# EAGLE board Bullseye_Calibrator_Through_Hole (EAGLE 7.7.0)
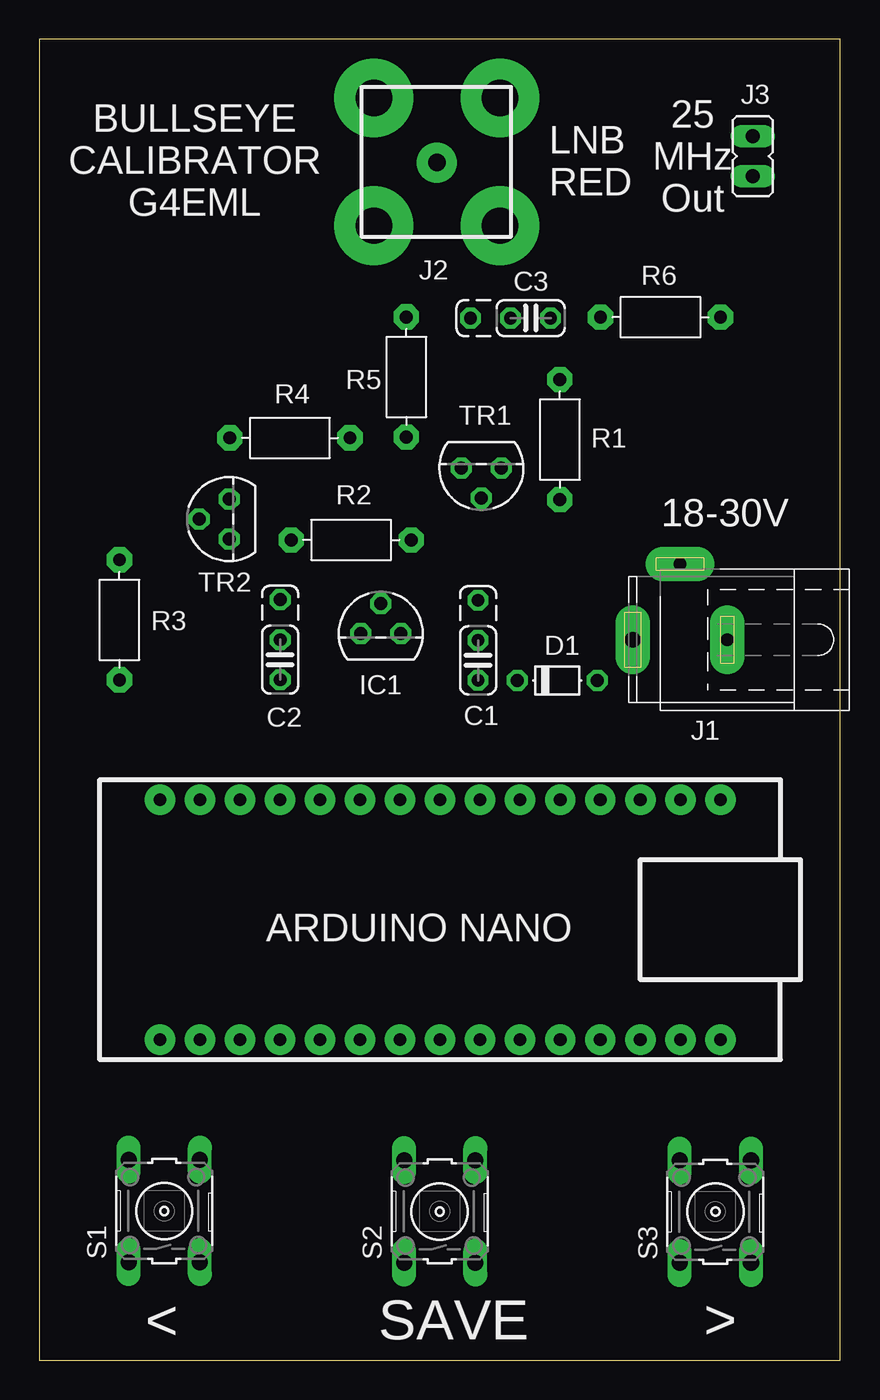
[diagram p0: board, top side]
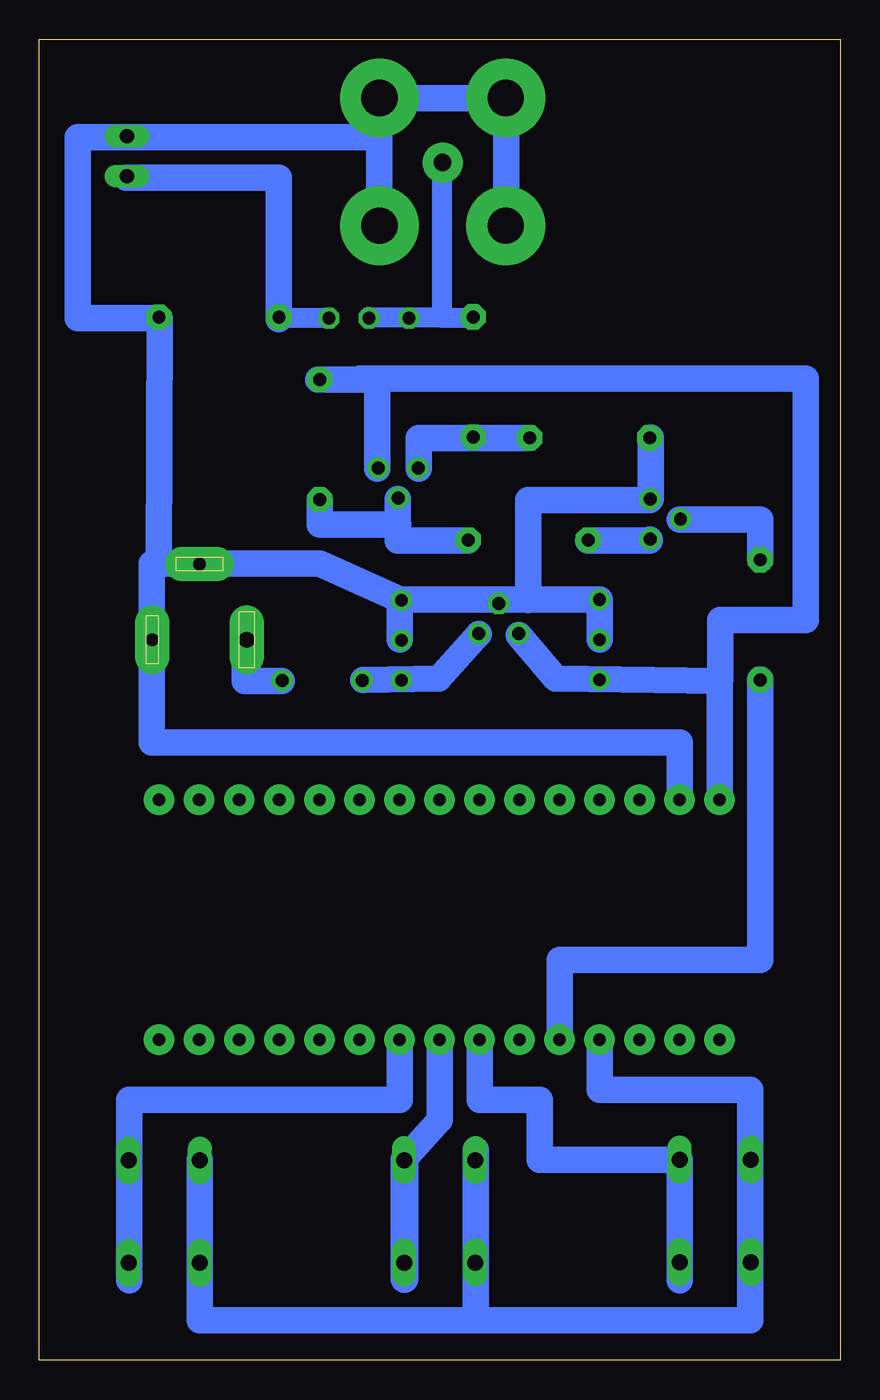
[diagram p1: board, bottom side, seen from below]

Size 50.8 x 83.82 mm. Coordinates in mm from the lower left corner, seen from the top.
Outline: 0,83.82 0,0 50.8,0 50.8,83.82 0,83.82
Copper layers (1*16): Top 0.035mm / dielectric 1.5mm / Bottom 0.035mm
Design rules "default": minimum track width 10mil, minimum drill 24mil, track to track 8mil, track to pad 8mil, pad to pad 8mil, via to via 8mil, smd to smd 8mil, copper to edge 40mil, drill to drill 8mil, minimum pad ring 10mil, minimum via ring 8mil, stop-mask expansion 4mil, vias tented up to drill 0mil, thermal gap 10mil

## Footprints (pad centres in the part's own frame; a part is rotated, then mirrored left to right if it is on the bottom)
C025_050-024X070 = drill 0.813 octagon: 1 -3.81,0; 2 -1.27,0; 3 1.27,0
D-5 = drill 0.813 octagon: A 2.54,0; C -2.54,0
TO92 = drill 0.813 octagon: 1 -1.27,0; 2 0,1.905; 3 1.27,0
SPC4077 = drill 0.8 pad 2.184 long: 1 -3,0; 2 0,-4.8 | drill 1 pad 2.184 long: 3 3,0
JP1 = drill 0.914 long: 1 0,-1.27; 2 0,1.27
R-7,5 = drill 0.813 pad 1.6 octagon: 1 -3.81,0; 2 3.81,0
B3F-10XX = drill 1.016 long: 1 -3.251,2.261; 2 3.251,2.261; 3 -3.251,-2.261; 4 3.251,-2.261

## Placement (x,y rotation side)
C1  100n  [C025_050-024X070]  27.83,44.41 270 top
C2  100n  [C025_050-024X070]  15.27,44.45 270 top
C3  470p  [C025_050-024X070]  31.16,66.13 0 top
D1  [D-5]  32.86,43.14 0 top
IC1  78L15  [TO92]  21.66,46.1 0 top
J1  [SPC4077]  40.64,45.72 180 top
J3  [JP1]  45.26,76.41 0 top
R1  10K  [R-7,5]  33.02,58.42 270 top
R2  1K  [R-7,5]  19.78,52.05 180 top
R3  10K  [R-7,5]  5.08,46.98 90 top
R4  3K3  [R-7,5]  15.89,58.53 180 top
R5  1K  [R-7,5]  23.28,62.39 90 top
R6  75  [R-7,5]  39.4,66.19 180 top
S1  [B3F-10XX]  7.92,9.46 90 top
S2  [B3F-10XX]  25.4,9.43 90 top
S3  [B3F-10XX]  42.89,9.42 90 top
TR1  P-Chan  [TO92]  28.04,56.62 180 top
TR2  NPN  [TO92]  12.04,53.38 90 top

## Library data of the parts
C1-C3 = rcl
D1 = ref-packages
IC1 TR1 TR2 = linear
J1 = con-jack
J3 = jumper
R1-R6 = discrete
S1-S3 = switch-omron

## Tracks (layer width: path | path; a pad name or v marks a point on that pad's centre or on a via)
D1
  Bottom 1.676: 22.93,46.08 25.45,43.26 30.26,43.17
S$1  (via drill 1.1 pad 2.54)
  other vias: 25.22,76
S$2  (via drill 0.8 pad 1.93)
  other vias: 43.2,35.57
S$3  (via drill 0.8 pad 1.93)
  other vias: 40.66,35.57
S$4  (via drill 0.8 pad 1.93)
  other vias: 38.12,35.57
S$5  (via drill 0.8 pad 1.93)
  other vias: 35.58,35.57
S$6  (via drill 0.8 pad 1.93)
  other vias: 33.04,35.57
S$7  (via drill 0.8 pad 1.93)
  other vias: 30.5,35.57
S$8  (via drill 0.8 pad 1.93)
  other vias: 27.96,35.57
S$9  (via drill 0.8 pad 1.93)
  other vias: 25.42,35.57
S$10  (via drill 0.8 pad 1.93)
  other vias: 22.88,35.57
S$11  (via drill 0.8 pad 1.93)
  other vias: 20.34,35.57
S$12  (via drill 0.8 pad 1.93)
  other vias: 17.8,35.57
S$13  (via drill 0.8 pad 1.93)
  other vias: 15.26,35.57
S$14  (via drill 0.8 pad 1.93)
  other vias: 12.72,35.57
S$15  (via drill 0.8 pad 1.93)
  other vias: 10.18,35.57
S$16  (via drill 0.8 pad 1.93)
  other vias: 7.64,35.57
S$17  (via drill 0.8 pad 1.93)
  other vias: 7.64,20.33
S$18  (via drill 0.8 pad 1.93)
  other vias: 10.18,20.33
S$19  (via drill 0.8 pad 1.93)
  other vias: 12.72,20.33
S$20  (via drill 0.8 pad 1.93)
  other vias: 15.26,20.33
S$21  (via drill 0.8 pad 1.93)
  other vias: 17.8,20.33
S$22  (via drill 0.8 pad 1.93)
  other vias: 20.34,20.33
S$23  (via drill 0.8 pad 1.93)
  other vias: 22.88,20.33
S$24  (via drill 0.8 pad 1.93)
  other vias: 25.42,20.33
S$25  (via drill 0.8 pad 1.93)
  other vias: 27.96,20.33
S$26  (via drill 0.8 pad 1.93)
  other vias: 30.5,20.33
S$27  (via drill 0.8 pad 1.93)
  other vias: 33.04,20.33
S$28  (via drill 0.8 pad 1.93)
  other vias: 35.58,20.33
S$29  (via drill 0.8 pad 1.93)
  other vias: 38.12,20.33
S$30  (via drill 0.8 pad 1.93)
  other vias: 40.66,20.33
S$31  (via drill 0.8 pad 1.93)
  other vias: 43.2,20.33
S$32
  Bottom 1.676: 5.71,12.7 5.71,2.54 23.11,2.54 | 23.11,2.54 23.11,13.34 | 23.11,2.54 40.64,2.54 40.64,12.7
S$33
  Bottom 1.676: 15.24,20.32 15.24,17.14 5.7,17.14 5.7,11.97
S$34
  Bottom 1.676: 17.78,20.32 17.78,25.4 5.08,25.4 5.08,43.18
S$35  (via drill 2.3 pad 5)
  other vias: 29.22,72
S$36  (via drill 2.3 pad 5)
  other vias: 29.22,80.1
S$37  (via drill 2.3 pad 5)
  other vias: 21.22,72
S$38  (via drill 2.3 pad 5)
  other vias: 21.22,80.1
S$39
  Bottom 1.676: 22.86,20.32 22.86,16.51 19.05,16.51 19.05,12.7 10.16,12.7 10.16,5.08
S$40
  Bottom 1.676: 25.4,20.32 25.4,15.24 27.65,12.75
  Bottom 1.778: 27.65,12.75 27.65,5.13
S$41
  Bottom 1.676: 27.94,20.32 27.94,16.51 45.09,16.51 45.09,5.08
S$42
  Bottom 1.676: 20.39,46.01 18.03,43.25 7.63,43.09 7.63,35.56
  Bottom 1.778: 7.63,35.56 7.62,35.56
S$43
  Bottom 1.676: 35.42,43.1 37.76,43.1 37.76,45.46
S$44
  Bottom 1.676: 27.94,45.72 27.94,48.26 | 27.94,48.26 15.24,48.26 15.24,45.72 | 27.94,48.26 33.02,50.54 43.66,50.54 43.66,44.58
  Bottom 1.778: 43.66,44.58 43.7,44.58
S$46
  Bottom 1.676: 43.66,45.68 43.66,39.21 10.19,39.21 10.19,35.56
  Bottom 1.778: 10.19,35.56 10.16,35.56
S$47
  Bottom 1.676: 5.08,50.8 5.08,53.34 10.16,53.34
S$48
  Bottom 1.676: 12.08,54.58 19.77,54.58 19.77,48.24
S$49
  Bottom 1.676: 15.98,52.02 12.09,52.02 12.09,52.09
S$50
  Bottom 1.676: 23.64,52.03 28.06,52.03 28.06,54.65
S$51
  Bottom 1.676: 33.03,54.6 33.03,53.02 28.03,53.02
S$52
  Bottom 1.676: 29.35,56.58 29.35,62.23 33.11,62.23
S$53
  Bottom 1.676: 7.62,43.18 7.62,46.97 2.17,46.97 2.17,62.3 30.46,62.3
S$54
  Bottom 1.676: 12.03,54.65 12.03,58.54
S$55
  Bottom 1.676: 19.74,58.52 26.73,58.52 26.73,56.59
S$56
  Bottom 1.27: 25.29,76 25.29,66.16 23.18,66.16
S$57
  Bottom 1.676: 21.18,71.94 21.18,80.21 21.25,80.21 21.25,80.09 29.25,80.09 29.25,71.87
S$58
  Bottom 1.27: 29.92,66.09 29.92,66.2 25.02,66.2
S$59
  Bottom 1.27: 32.44,66.09 32.44,66.12 35.7,66.12
S$60
  Bottom 1.676: 43.18,66.1 43.23,50.44
S$61
  Bottom 1.676: 43.24,66.12 48.38,66.12 48.38,77.61 29.35,77.61 29.35,77.56
S$62
  Bottom 1.676: 45.28,75.04 35.63,75.04 35.63,66.07

## Text on the board
tPlace: BULLSEYE / CALIBRATOR / G4EML | 25 / MHz / Out | LNB / RED | J2 | 18-30V | ARDUINO NANO | < | SAVE | >